# Altium PCB car_template 2020V3.PcbDoc (part 2 of 2)
Units mm, origin at the board's own origin, x right, y up, seen from the top; angles counter-clockwise.
Board outline 64 x 85 mm, 4 copper layers (Top Side, Ground Plane, Power Plane, Bottom Side), stack 0.844 mm thick; 154 components, 91 nets, 434 pads, 166 vias.
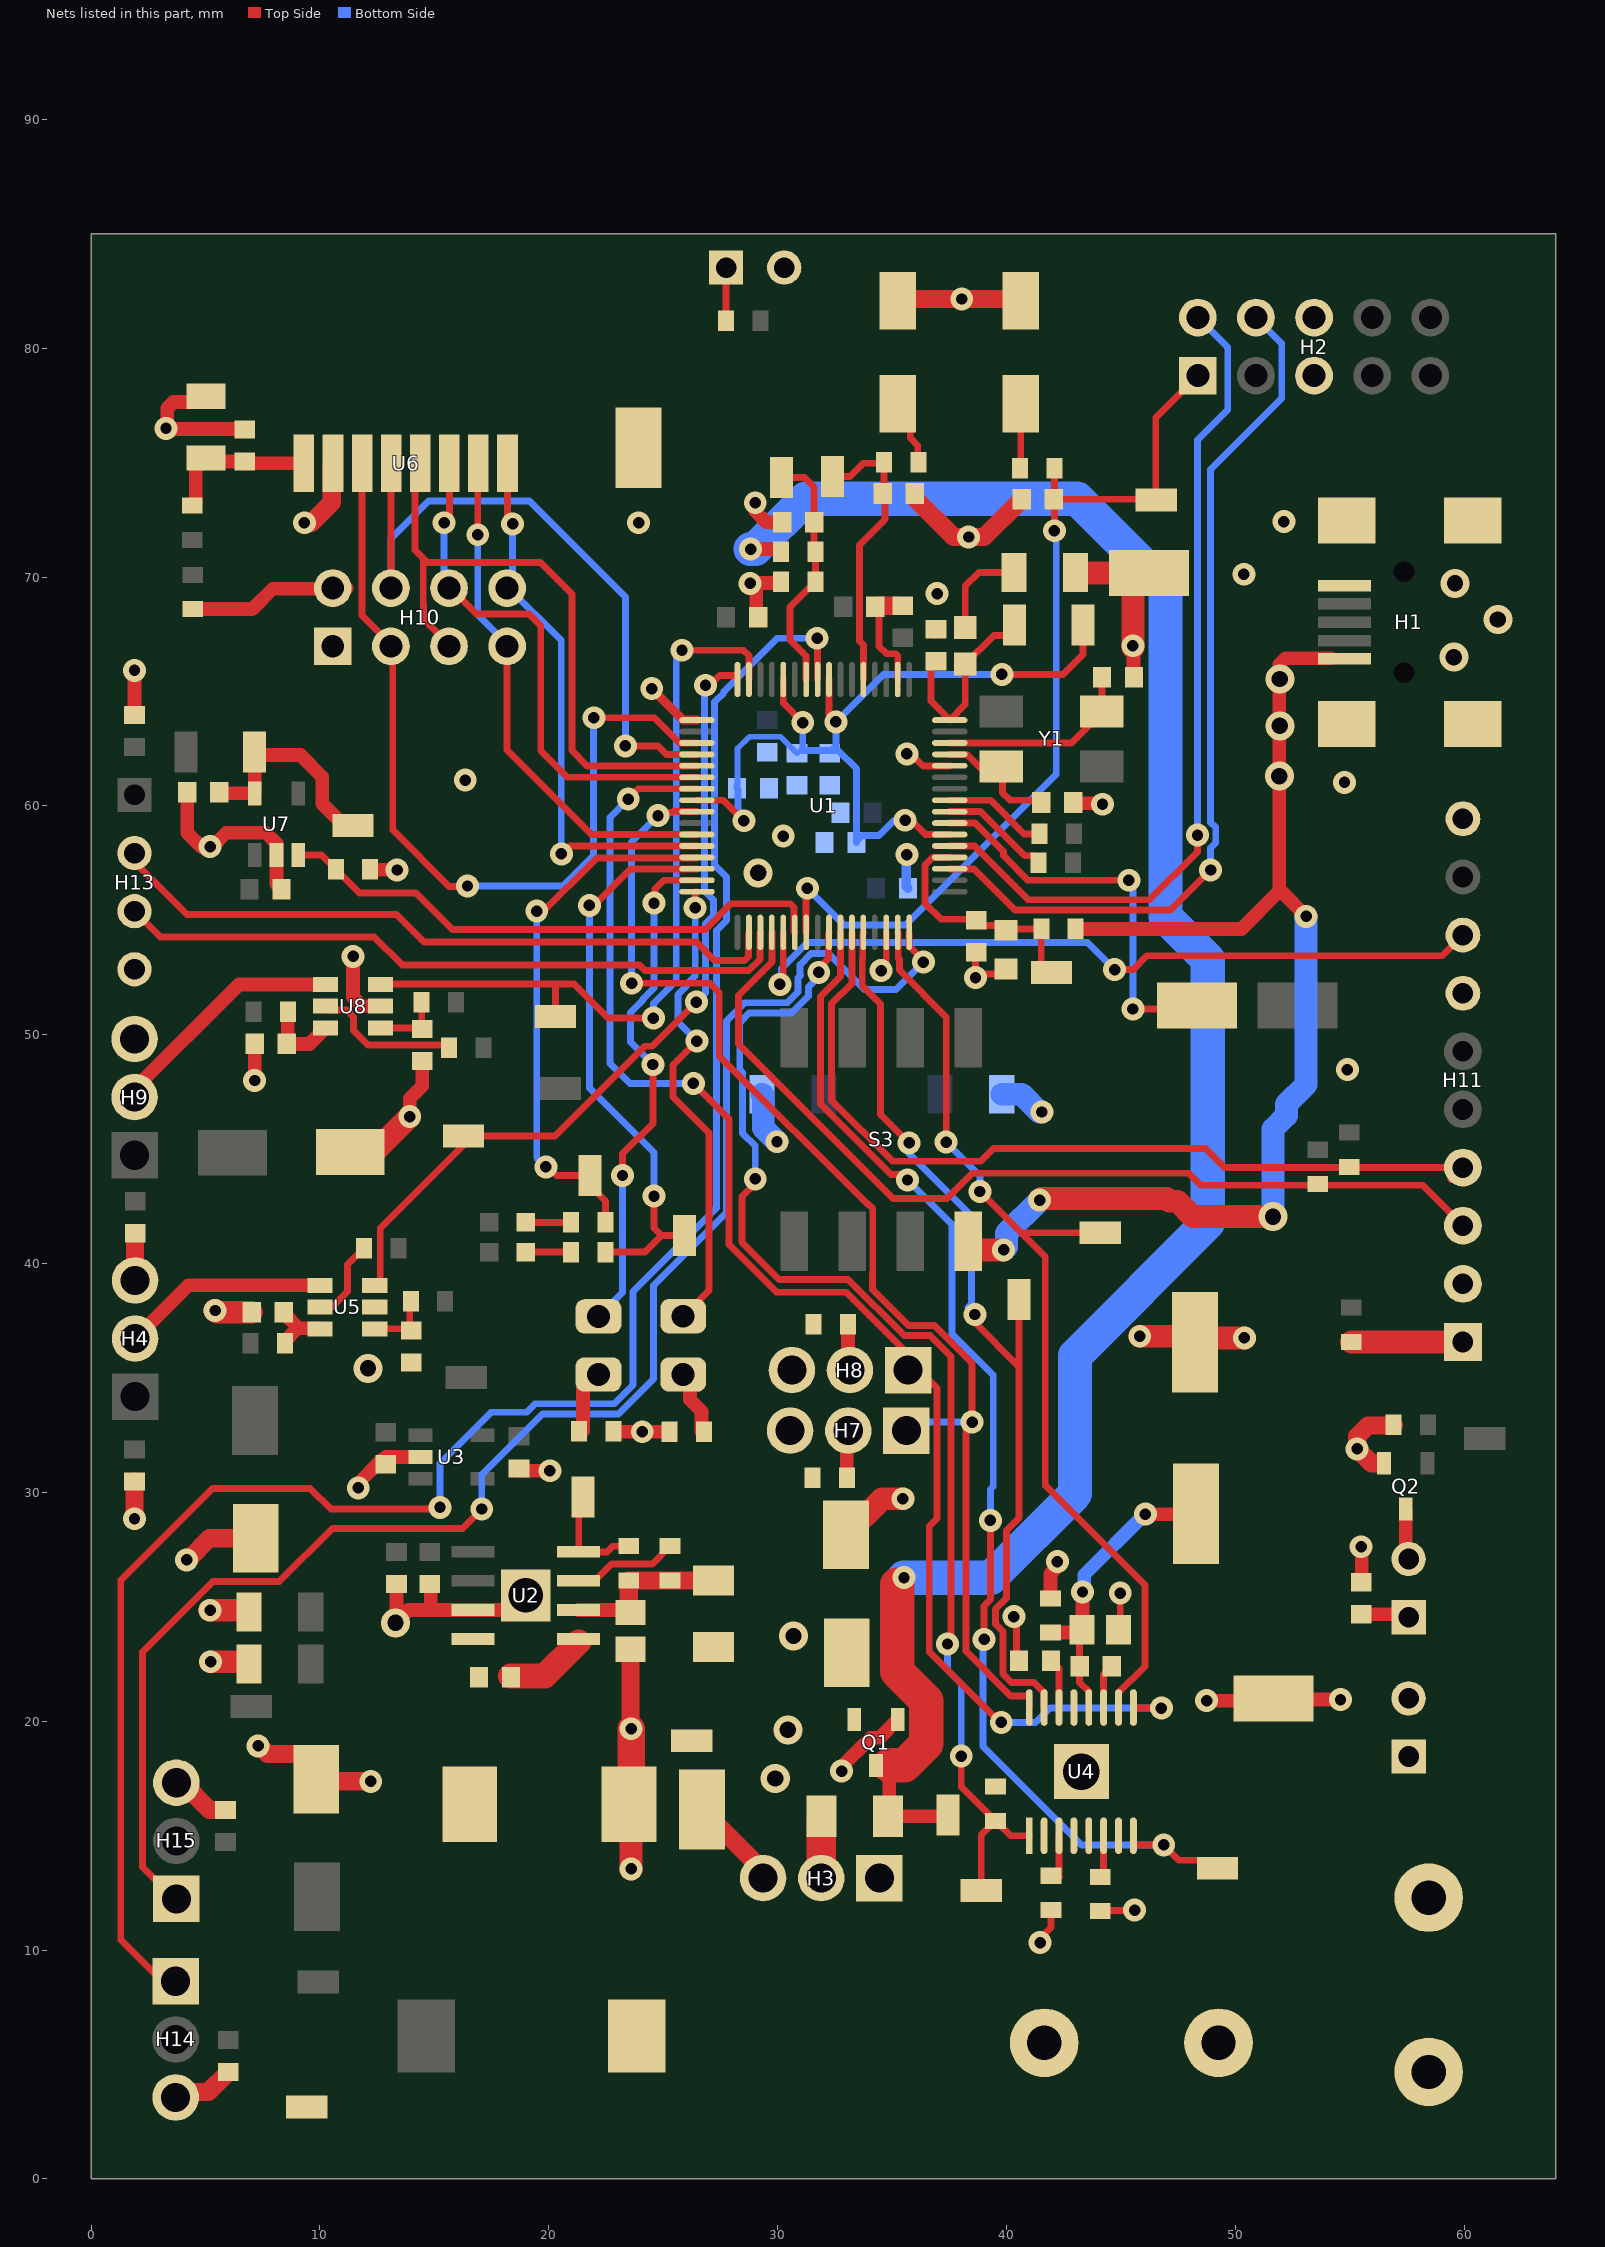
[diagram p4: the nets of this part, all layers, seen from the top]

## Via types
v1: diameter 1, hole 0.5, Top Side to Bottom Side, 145 vias
v2: diameter 1.27, hole 0.711, Top Side to Bottom Side, 19 vias
v3: diameter 2.2, hole 1.6, Top Side to Bottom Side, 1 vias
v4: diameter 2, hole 1.5, Top Side to Bottom Side, 1 vias

## Nets (pads, with @x,y where several pads share a name; then routed paths per layer and width w, separated by ;. In a path a pad name is that pad's centre, name@x,y a point inside that pad or via, vN(x,y) a via of type N, cw(c..) or ccw(c..) an arc to the next point about the centre after c; other vN are vias at no path point) (continued)
GND: C1.1 C2.1 C3.1 C4.1 C5.1 C6.2 C7.1 C8.2 C9.1 C10.2 C11.1 C12.2 C13.1 C15.2 C17.1 C18.1 C19.1 C21.1 C22.1 C23.1 C24.1 C25.1 C26.1 C27.1 C28.1 C29.1 C30.1 C31.1 C32.1 C33.1 C34.1 C35.1 C36.1 C37.1 C38.1 C39.1 C40.1 C41.1 C44.1 C47.1 C48.1 C50.1 C51.1 C52.1 C53.1 C54.1 C55.1 D1.1 GND_BUCK.1 GND_HBR.1 GND_MCU.1 GND_RADIO.1 H1.5 H1.6 H1.7 H1.8 H1.9 H2.5 H2.6 H3.1 H3.3 H4.3 H7.3 H8.3 H9.3 H10.1 H11.2 H11.7 H11.10 H12.2 H13.4 H14.3 H15.3 H16.2 Q1.1 Q2.2 R2.1 R7.1 R10.1 R12.2 R13.2 R20.1 R29.1 R30.1 R31.2 R32.2 S1.1 S2.1 U1.2 U1.17 U1.46 U1.60 U2.7 U2.EPAD U3.2 U4.13 U4.17 U5.2 U6.2 U7.2 U8.2 | length 159.9
  Top Side w0.3: C5.1@34.275,68.7 34.425,68.55 34.425,66.976 34.751,66.65 35.164,66.65 35.25,66.564 U1.2@35.25,65.525 ; v1(34.525,52.8) 34.525,52.989 34.75,53.214 U1.46@34.75,54.475 ; v1(35.65,62.275) 35.839,62.275 36.364,61.75 U1.60@37.525,61.75 ; C30.1@38.475,53.7 C30.1@38.625,53.55 ; C30.1@38.65,53.5 v1(38.65,52.5) 38.839,52.5 38.989,52.65 39.75,52.65 R2.1@39.975,52.875 ; v1(40.325,24.575) 40.437,24.463 40.437,22.763 C22.1@40.55,22.65 ; v1(41.475,10.325) 41.475,10.514 41.95,10.989 R31.2@41.95,11.75 ; R32.2@43.95,11.725 45.575,11.725 v1(45.6,11.75) ; C21.1@44.9,24 44.975,24.075 v1(44.975,25.6)
  Top Side w0.4: v1(24.5,65.125) 25.875,63.75 U1.17@26.475,63.75
  Top Side w0.6: C44.1@1.9,63.975 v1(1.9,65.925) ; v1(3.275,76.5) 3.325,76.55 3.325,77.374 3.601,77.65 4.775,77.65 C39.1@5.025,77.9 ; v1@3.325,76.45 3.35,76.475 6.7,76.475 C35.1@6.725,76.45 ; C34.1@4.2,60.6 4.2,58.825 4.8,58.225 v1(5.2,58.225) 5.308,58.225 5.908,58.825 7.636,58.825 8.1,58.361 U7.2@8.1,57.85 8.1,56.575 C33.1@8.325,56.35 ; v1(7.15,48) C40.1@7.15,49.6 ; v1(11.45,53.425) 11.45,51.65 11.85,51.25 U8.2@12.65,51.25 ; v1(11.675,30.2) 11.675,30.4 12.688,31.413 C31.1@12.875,31.225 12.875,31.55 U3.2@14.4,31.55 ; R30.1@12.2,57.225 12.212,57.212 13.363,57.212 v1(13.375,57.2) ; C17.1@13.35,26 13.35,24.35 v2(13.3,24.3) 13.865,24.865 14.85,24.865 ; v1(13.925,46.425) 13.925,47.208 14.475,47.758 C38.1@14.475,48.85 ; C18.1@14.8,26 14.85,25.95 14.85,24.865 ; C32.1@18.7,31.05 18.688,31.037 18.688,30.95 v1(20.05,30.95) ; v4(19,25.5) 18.365,24.865 U2.7@16.689,24.865 14.85,24.865 ; R12.2@22.975,32.675 23,32.65 v1(24.088,32.65) R13.2@25.175,32.65 ; v1(29.025,73.25) 29.025,72.875 29.5,72.4 C25.1@30.2,72.4 ; C52.1@29.15,68.25 29.073,68.327 29.073,69.725 29.087,69.739 30.1,69.739 30.15,69.789 R10.1@30.15,69.8 ; v1(32.8,17.825) 32.8,18.011 34.064,19.275 34.45,19.275 Q1.1@35.25,20.075 ; C4.1@42.925,60.15 42.962,60.112 44.163,60.112 v1(44.2,60.075) ; v1(45.525,67) 45.55,66.975 45.55,65.65 C3.1@45.575,65.625 ; v1(48.75,20.9) 51.525,20.9 51.575,20.95 v1(54.6,20.95) ; C50.1@55.5,26.075 55.525,26.1 55.525,27.6 v1(55.5,27.625)
  Top Side w0.8: v1(1.9,28.85) C27.1@1.9,30.475 ; H4.3@1.925,39.265 C37.1@1.925,41.325 ; v1(3.275,76.5) 3.375,76.502 3.326,76.451 v1@3.325,76.45 ; H14.3@3.7,3.56 3.936,3.796 5.121,3.796 C47.1@6,4.675 ; H15.3@3.725,17.315 3.985,17.315 5.175,16.125 C41.1@5.875,16.125 ; v1(4.175,27.05) 4.229,27.05 5.179,28 C36.1@7.2,28 ; v1(7.3,18.925) 7.354,18.925 7.709,18.57 9.242,18.57 9.842,17.97 C48.1@9.842,17.47 9.937,17.375 v1(12.225,17.375) ; v1(9.325,72.375) 9.625,72.375 10.521,73.271 10.521,74.925 U6.2@10.571,74.975 ; C1.1@23.575,23.15 23.575,19.7 v1(23.6,19.675) ; GND_BUCK.1@26.9,16.3 26.9,15.953 29.37,13.483 H3.3@29.37,13.15 ; C5.1@34.275,68.7 34.325,68.75 C13.1@35.325,68.75 ; S2.1@35.8,82.1 35.825,82.075 35.9,82.15 v1(38.05,82.15) 40.55,82.15 S1.1@40.625,82.075 ; C54.1@36.075,73.375 37.7,71.75 v1(38.35,71.75) 39.025,71.75 C53.1@40.675,73.4 ; C15.2@36.887,67.725 C15.2@36.925,67.725 ; Q2.2@56.3,31.275 55.95,31.275 v1(55.325,31.9) 55.325,32.45 55.8,32.925 56.9,32.925 R29.1@56.925,32.95
  Top Side w1: v1(5.2,24.85) 6.725,24.85 6.85,24.725 C19.1@6.9,24.775 ; v1(5.225,22.6) 6.7,22.6 6.85,22.45 C23.1@6.9,22.5 ; v1(5.425,37.95) 5.5,37.875 C29.1@7.025,37.875 ; C2.1@11.325,44.875 12.375,44.875 v1(13.925,46.425) ; D1.1@23.5,16.375 23.6,16.275 v1(23.6,13.55) ; C55.1@32.992,28.145 34.572,29.725 v1(35.475,29.725) ; R7.1@43.025,70.2 43.05,70.175 46.025,70.175 45.525,69.675 v1@45.525,66.925 ; v1(45.825,36.825) 47.991,36.825 C51.1@48.246,36.569 48.427,36.75 v1(50.4,36.75) ; GND_MCU.1@46.225,69.775 GND_MCU.1@46.225,70.175
  Top Side w1.2: D1.1@23.5,16.375 23.6,16.475 v1(23.6,19.675)
  Bottom Side w0.4: v1(35.65,57.875) 35.626,57.851 35.626,56.474 C9.1@35.7,56.4
  Bottom Side w0.6: v1@41.442,46.625 v1(41.55,46.625)
  Bottom Side w1: C24.1@29.325,47.4 29.375,47.35 29.375,45.925 v1(29.975,45.325) ; C26.1@39.8,47.4 40.667,47.4 v1@41.442,46.625
  other v1: 54.9,48.475 30.248,58.677 54.775,61.025 16.35,61.125 36.975,69.275 28.8,69.725 50.375,70.125 23.925,72.375 52.125,72.425
  other v2: 12.1,35.425 29.15,57.075 59.55,66.5 61.475,68.15 59.6,69.725
  other v3: 43.275,17.8
LED_TAPE_3V3_A: TAPE_A.1 U1.16 U5.3 | length 36.7
  Top Side w0.3: U5.3@12.4,39.05 12.463,39.05 12.638,39.225 12.638,41.538 16.675,45.575 TAPE_A.1@16.275,45.575 ; TAPE_A.1@16.951,45.575 20.275,45.575 22.128,47.428 24.2,49.5 24.525,49.5 v1(26.45,51.425) ; v1(26.85,65.275) 27.039,65.275 27.464,65.7 28.225,65.7 28.25,65.675 U1.16@28.25,65.525
  Bottom Side w0.3: v1(26.45,51.425) 26.85,51.825 26.85,54.869 27.2,55.219 27.2,55.881 26.8,56.281 26.8,65.225 v1(26.85,65.275)
LED_TAPE_3V3_B: TAPE_B.1 U1.15 U8.3 | length 34.6
  Top Side w0.3: U8.3@12.65,52.2 12.669,52.219 20.3,52.219 ; TAPE_B.1@20.3,50.8 20.3,52.219 ; v1(24.575,50.725) 22.6,50.725 21.106,52.219 20.3,52.219 ; v1(25.825,66.8) 28.514,66.8 28.75,66.564 U1.15@28.75,65.525
  Bottom Side w0.3: v1(24.575,50.725) 24.575,51.375 25.575,52.375 25.575,66.55 v1(25.825,66.8)
LED_TAPE_5V_A: H4.2 U5.4 | length 9.1
  Top Side w0.6: H4.2@1.7,37.06 2.26,37.06 4.25,39.05 U5.4@10,39.05
LED_TAPE_5V_B: H9.2 U8.4 | length 10.4
  Top Side w0.6: H9.2@1.8,47.54 6.46,52.2 U8.4@10.25,52.2
M1_OUT1: H5.1 U4.2 | length 0.4
  Top Side w1.5: H5.1@41.65,5.95 H5.1@41.65,6.356
M1_OUT2: H5.2 U4.4
M2_OUT1: H6.1 U4.7 | length 0.7
  Top Side w0.3: U4.7@44.9,14.35 U4.7@44.9,15
M2_OUT2: H6.2 U4.5 | length 0.7
  Top Side w0.3: U4.5@43.6,15 U4.5@43.6,15.65
MISO: H10.7 U1.27 U6.7 | length 23.3
  Top Side w0.3: v1(16.9,71.85) 16.9,74.946 U6.7@16.929,74.975 ; H10.7@18.018,66.975 H10.7@18.183,66.975 18.183,62.442 21.875,58.75 U1.27@26.475,58.75
  Bottom Side w0.3: v1(16.9,71.85) 16.9,68.34 H10.7@18.416,66.824
MOSI: H10.6 U1.22 U6.6 | length 23.1
  Top Side w0.3: v1(15.425,72.375) 15.657,72.607 U6.6@15.657,74.975 U6.6@15.671,74.961 ; H10.6@15.725,69.515 16.85,68.39 19.135,68.39 19.65,67.875 19.65,62.425 20.825,61.25 U1.22@26.475,61.25
  Bottom Side w0.3: v1(15.425,72.375) 15.425,69.815 H10.6@15.725,69.515
Net3V3_RADIO_1: 3V3_RADIO.1 C34.2 L3.1 U7.5 | length 9.7
  Top Side w0.6: C34.2@5.6,60.6 5.65,60.55 U7.5@7.15,60.55 L3.1@7.15,62.35 7.275,62.225 9.15,62.225 10.1,61.275 10.1,60.1 11.05,59.15 3V3_RADIO.1@11.45,59.15
Net5V_BUCK_RAW_1: BUCK_RAW.1 C16.2 D1.2 L2.1 U2.8 | length 0.1
  Top Side w1.1: D1.2@16.55,16.375 D1.2@16.654,16.479
NetC1_2: C1.2 F2.2 R8.2 R11.2 U2.2 | length 7.3
  Top Side w0.3: C1.2@23.46,24.865 23.5,24.825 C1.2@23.575,24.75
  Top Side w0.6: U2.2@21.311,24.865 C1.2@23.46,24.865
  Top Side w0.8: C1.2@23.5,24.825 R11.2@23.5,26.15 R8.2@25.3,26.15 F2.2@27.2,26.15
NetC3_2: C3.2 U1.62 Y1.3 | length 8.7
  Top Side w0.3: U1.62@37.525,62.75 42.85,62.75 44.175,64.075 C3.2@44.175,65.55
NetC4_2: C4.2 U1.61 Y1.1 | length 5.1
  Top Side w0.3: U1.61@37.525,62.25 38.276,62.25 38.6,61.926 ; 38.6,61.925 38.85,61.675 39.775,61.675 Y1.1@39.762,61.662 ; Y1.1@39.775,61.725 39.825,61.675 39.825,60.575 40.15,60.25 41.062,60.25 41.062,60.237
NetC6_1: C6.1 C8.1 C10.1 C12.1 L1.2 U1.8 U1.12 U1.24 U1.54 | length 39.4
  Top Side w0.3: U1.24@26.475,60.25 27.625,60.25 v1(28.525,59.35) ; U1.12@30.25,65.525 30.25,64.49 v1(31.1,63.64) ; U1.8@32.25,65.525 32.25,63.975 v1(32.55,63.675) ; v1(35.575,59.375) 35.839,59.375 36.464,58.75 U1.54@37.525,58.75 ; v1(39.8,65.75) 42.475,65.75 43.35,66.625 L1.2@43.35,67.9
  Bottom Side w0.25: C10.1@28.2,60.9 28.25,60.95 28.25,62.504 28.771,63.025 30.125,63.025 C8.1@30.85,62.3
  Bottom Side w0.3: C10.1@28.225,60.775 28.275,60.725 28.275,59.789 28.525,59.539 v1(28.525,59.35) ; C8.1@31.075,62.425 C6.1@32.35,62.425 ; C8.1@31.075,62.475 31.1,62.5 v1(31.1,63.64) ; C12.1@33.45,58.4 C12.1@33.45,58.45 ; v1(35.575,59.375) 35.099,59.375 34.424,58.7 33.7,58.7 C12.1@33.45,58.45 ; v1(39.8,65.75) 34.625,65.75 v1(32.55,63.675) 32.55,62.625 C6.1@32.35,62.425 ; C6.1@32.35,62.425 32.65,62.425 33.45,61.625 C12.1@33.45,58.45
NetC14_1: C14.1 R7.2 | length 4.2
  Top Side w0.3: C14.1@38.2,67.8 38.2,69.6 38.8,70.2 R7.2@40.325,70.2
NetC14_2: C14.2 C15.1 L1.1 U1.64 | length 8.2
  Top Side w0.3: 36.7,65.9 36.7,64.575 U1.64@37.525,63.75 38.2,64.425 C14.2@38.2,66.2 39.45,67.45 L1.1@40.275,67.45 ; L1.1@40.35,67.9 L1.1@40.612,68.163
NetC16_1: C16.1 U2.1 | length 3.7
  Top Side w0.3: U2.1@21.311,23.461 U2.1@21.311,23.595
  Top Side w1.1: C16.1@18.325,21.975 19.825,21.975 U2.1@21.311,23.461
NetC20_1: C20.1 U4.11 | length 1.9
  Top Side w0.3: U4.11@44.25,20.6 44.25,22.05 C20.1@44.6,22.4
NetC20_2: C20.2 C21.2 C51.2 R17.1 U4.12 | length 13.3
  Top Side w0.3: C21.2@43.2,23.9 C20.2@43.2,22.4 43.2,21.7 43.6,21.3 U4.12@43.6,20.6
  Top Side w0.6: R17.1@41.85,23.875 C21.2@43.175,23.875 ; C21.2@43.3,24 43.325,24.025 v1(43.325,25.65) ; v1(46.075,29.05) 48.255,29.05 C51.2@48.279,29.074
  Top Side w1: C21.2@43.175,23.875 C21.2@43.2,23.9
  Bottom Side w0.6: v1(43.325,25.65) 43.402,25.727 43.402,26.402 46.05,29.05 v1(46.075,29.05)
NetC22_2: C22.2 U4.14 | length 2.2
  Top Side w0.3: C22.2@41.95,22.65 42.3,22.3 U4.14@42.3,20.6
NetC28_2: C28.2 R15.2 U5.1 | length 3
  Top Side w0.3: U5.1@12.4,37.15 13.85,37.15 C28.2@14,37 ; R15.2@13.925,38.35 13.925,37.15 C28.2@14,37.075
NetC29_2: C29.2 R16.1 U5.6 | length 2.8
  Top Side w0.6: C29.2@8.425,37.875 8.425,37.825 9.075,37.175 ; R16.1@8.475,36.525 8.475,36.625 9.025,37.175 9.075,37.175 ; U5.6@10,37.15 9.975,37.175 9.075,37.175
NetC35_2: C35.2 C39.2 R19.1 U6.1 | length 6.8
  Top Side w0.6: R19.1@4.425,73.125 4.525,73.125 4.575,73.175 4.575,74.75 C39.2@5.025,75.2 5.175,75.05 C35.2@6.725,75.05 6.8,74.975 U6.1@9.3,74.975
NetC38_2: C38.2 R21.2 U8.1 | length 3.1
  Top Side w0.3: U8.1@12.65,50.3 14.35,50.3 14.45,50.2 14.45,51.4 R21.2@14.425,51.425
NetC40_2: C40.2 R22.1 U8.6 | length 3.5
  Top Side w0.3: C40.2@8.55,49.6 8.6,49.65 C40.2@8.65,49.7
  Top Side w0.6: C40.2@8.55,49.6 9.55,49.6 U8.6@10.25,50.3 ; C40.2@8.6,49.65 R22.1@8.6,51
NetDL1_1: DL1.1 R6.2 | length 2
  Top Side w0.3: DL1.1@19,40.5 R6.2@20.975,40.5
NetDL2_1: DL2.1 R5.2 | length 2
  Top Side w0.3: DL2.1@19,41.8 R5.2@20.975,41.8
NetF1_1: F1.1 H3.2 | length 2.8
  Top Side w0.3: F1.1@31.935,15.66 F1.1@32.125,15.85
  Top Side w1.3: H3.2@31.91,13.15 F1.1@31.91,15.66
NetH7_2: H7.2 R27.1 | length 2.1
  Top Side w0.3: H7.2@33.05,33.085 H7.2@33.115,33.15
  Top Side w0.6: R27.1@33.025,30.65 H7.2@33.025,32.635
NetH8_2: H8.2 R28.1 | length 2
  Top Side w0.3: H8.2@33.1,35.89 H8.2@33.19,35.8
  Top Side w0.6: H8.2@33.075,35.44 R28.1@33.075,37.35
NetH10_2: H10.2 R35.1 | length 6.4
  Top Side w0.6: R35.1@4.45,68.6 7.05,68.6 7.94,69.49 H10.2@9.92,69.49 ; H10.2@10.563,69.515 H10.2@11.162,69.515
NetH11_1: H11.1 R36.1 | length 4.9
  Top Side w1: R36.1@55.075,36.575 H11.1@59.95,36.575
NetH11_8: H11.8 U1.37 | length 34.4
  Top Side w0.3: v1(30.101,52.201) 30.25,52.35 U1.37@30.25,54.475 ; v1(44.725,52.85) 45.55,52.85 46.152,53.452 59.047,53.452 H11.8@59.95,54.355
  Bottom Side w0.3: v1(30.101,52.201) 30.176,52.276 30.176,52.894 31.307,54.025 43.55,54.025 v1(44.725,52.85)
NetH12_1: H12.1 R26.2 | length 2.6
  Top Side w0.3: H12.1@27.5,83.525 H12.1@27.665,83.36 ; R26.2@27.7,81.2 R26.2@27.775,81.275 ; R26.2@27.75,81.275 27.75,83.36 H12.1@27.75,83.525
NetH17_2: H17.2 Q2.3 | length 2.2
  Top Side w0.3: H17.2@57.4,27.215 H17.2@57.45,27.265 ; Q2.3@57.45,29.275 Q2.3@57.45,29.425
  Top Side w0.6: H17.2@57.45,27.265 Q2.3@57.45,29.275
NetJ1_1: J1.1 U1.31 | length 22.6
  Top Side w0.3: v1(23.225,43.85) 23.225,44.8 24.55,46.125 v1(24.55,48.7) ; v1(24.6,55.75) 24.65,55.8 24.65,56.375 25.025,56.75 U1.31@26.475,56.75
  Bottom Side w0.3: J1.1@22.175,37.694 22.303,37.694 22.886,38.277 22.886,38.405 23.225,38.744 v1(23.225,43.85) ; v1(24.55,48.7) 23.575,49.675 23.575,50.975 24.125,51.525 24.125,51.561 24.6,52.036 v1(24.6,55.75)
NetJ1_2: J1.2 R12.1 | length 3
  Top Side w0.3: J1.2@22.2,35.625 J1.2@22.25,35.675
  Top Side w0.6: R12.1@21.475,32.675 21.5,32.7 21.5,34.475 21.521,34.496 21.521,34.706 21.966,35.15 J1.2@22.175,35.15
NetJ2_1: J2.1 U1.32 | length 20.9
  Top Side w0.3: J2.1@25.875,37.7 26.003,37.7 26.586,38.283 26.586,38.411 27,38.825 27,45.7 25.425,47.275 25.425,48.675 v1(26.475,49.725) ; v1(26.4,55.55) 26.4,56.225 26.425,56.25 U1.32@26.475,56.25
  Bottom Side w0.3: v1(26.4,55.55) 26.4,52.575 26.025,52.2 26.025,52.131 25.65,51.756 25.65,50.55 v1(26.475,49.725)
NetJ2_2: J2.2 R13.1 | length 3.5
  Top Side w0.3: J2.2@25.825,35.675 J2.2@25.85,35.65
  Top Side w0.6: J2.2@25.875,35.156 26.084,35.156 26.529,34.712 26.175,34.712 26.175,34.05 26.675,33.55 R13.1@26.675,32.65
NetnFAULT_1: nFAULT.1 U1.42 U4.8 | length 53.4
  Top Side w0.3: U1.42@32.75,54.475 32.75,52.545 31.875,51.67 31.875,46.982 34.957,43.9 35.501,43.9 35.677,43.724 v1(35.677,43.652) ; v1(39.027,23.576) 39.027,25.045 39.3,25.318 v1(39.3,28.775) ; U4.8@45.55,15 45.55,14.6 v1(46.875,14.6) 47.55,13.925 nFAULT.1@49,13.925
  Bottom Side w0.3: v1(35.677,43.652) 37.625,41.704 37.625,36.925 39.425,35.125 39.425,30.25 39.3,30.125 v1(39.3,28.775) ; v1(39.027,23.576) 38.975,23.524 38.975,18.9 43.275,14.6 v1(46.875,14.6)
NetnSLEEP_1: nSLEEP.1 R20.2 U1.41 U4.1 | length 54.1
  Top Side w0.3: v1(29.025,43.7) 29.025,43.511 28.45,42.936 28.45,40.921 29.996,39.375 ; 30.058,39.312 33.074,39.312 35.536,36.85 36.661,36.85 37.575,35.936 37.575,23.524 v1(37.427,23.376) ; v1(31.802,52.728) 31.802,52.917 32.225,53.34 32.225,54.45 U1.41@32.25,54.475 ; v1(38.025,18.475) 38.025,17.15 R20.2@39.525,15.65 ; nSLEEP.1@38.9,12.6 38.9,15.025 R20.2@39.525,15.65 ; U4.1@41,15 40.175,15 R20.2@39.525,15.65
  Bottom Side w0.3: v1(29.025,43.7) 29.025,45.144 28.475,45.694 28.475,48.347 28.35,48.472 28.35,50.539 28.762,50.951 30.619,50.951 31.351,51.683 31.351,52.087 31.802,52.538 v1(31.802,52.728) ; v1(37.427,23.376) 37.427,22.248 38.025,21.65 v1(38.025,18.475)
NetPGOOD_1: PGOOD.1 R11.1 U2.4 | length 4.7
  Top Side w0.3: PGOOD.1@21.4,29.8 21.311,29.711 U2.4@21.311,27.405 22.555,27.405 22.8,27.65 R11.1@23.5,27.65
NetPWMH1_B_1: PWMH1_B.1 U1.47 U4.10 | length 42.3
  Top Side w0.3: U1.47@35.25,54.475 35.275,54.45 35.275,53.356 35.325,53.306 35.325,52.825 37.369,50.781 v1(37.369,45.305) ; v1(38.84,43.15) 40.64,41.35 ; PWMH1_B.1@44.1,41.35 40.64,41.35 ; U4.10@44.9,20.6 44.9,21.25 46.05,22.4 46.05,25.95 41.7,30.3 41.7,40.29 40.64,41.35
  Bottom Side w0.3: v1(37.369,45.305) 38.84,43.834 v1(38.84,43.15)
NetPWMH2_B_1: PWMH2_B.1 U1.44 U4.15 | length 41.2
  Top Side w0.3: U1.44@33.75,54.475 33.725,54.45 33.725,53.356 33.7,53.331 33.7,52.15 34.5,51.35 34.5,46.525 v1(35.75,45.275) ; v1(38.625,37.775) 38.625,37.425 40.538,35.513 ; PWMH2_B.1@40.55,38.425 40.55,28.894 40.002,28.346 40.002,25.383 39.525,24.906 39.525,24.244 39.85,23.919 39.85,22.076 40.226,21.7 41.2,21.7 41.65,21.25 U4.15@41.65,20.6
  Bottom Side w0.3: v1(35.75,45.275) 35.75,44.8 38.475,42.075 38.475,38.225 v1@38.325,38.075
NetR3_2: R3.2 U1.57 | length 4.5
  Top Side w0.3: U1.57@37.525,60.25 39.3,60.25 40.775,58.775 R3.2@41.45,58.775
NetR4_2: R4.2 U1.56 | length 4.9
  Top Side w0.3: U1.56@37.525,59.75 38.875,59.75 40.8,57.825 41.2,57.825 41.4,57.625 R4.2@41.4,57.525
NetR8_1: R8.1 U2.3 | length 4.6
  Top Side w0.3: U2.3@21.311,26.135 21.997,26.135 22.737,26.875 24.525,26.875 R8.1@25.3,27.65
NetR14_2: R14.2 S1.2 | length 2.8
  Top Side w0.3: R14.2@40.6,74.75 40.625,74.775 S1.2@40.625,77.575
NetR18_2: R18.2 S2.2 | length 2.9
  Top Side w0.3: S2.2@35.8,77.6 35.8,76.075 36.125,75.75 R18.2@36.125,74.8
NetR23_1: R23.1 U8.5 | length 6.5
  Top Side w0.3: U8.5@10.25,51.25 10.425,51.075 11.176,51.075 11.475,50.776 11.475,50.175 12.1,49.55 15.525,49.55 R23.1@15.65,49.425
NetR24_1: R24.1 U5.5 | length 3.7
  Top Side w0.3: U5.5@10,38.1 10.525,38.1 11.2,38.775 11.2,39.95 R24.1@11.925,40.675
NetR30_2: R30.2 U1.38 U7.3 | length 24.6
  Top Side w0.3: U7.3@9.05,57.85 10.075,57.85 R30.2@10.7,57.225 11.725,56.2 14.2,56.2 15.8,54.6 26.85,54.6 27.975,55.725 30.55,55.725 30.725,55.55 30.725,54.5 U1.38@30.75,54.475
NetR31_1: R31.1 U4.3 | length 1.8
  Top Side w0.3: U4.3@42.3,15 42.3,13.225 R31.1@42.325,13.2
NetR32_1: R32.1 U4.6 | length 1.8
  Top Side w0.3: R32.1@44,13.325 44.05,13.325 44.25,13.525 U4.6@44.25,15
NetTP2_1: TP2.1 U1.55 | length 17.6
  Top Side w0.3: U1.55@37.525,59.25 38.625,59.25 39.875,58 39.875,57.826 40.951,56.75 v1(45.35,56.75) ; v1(45.525,51.125) 46.775,51.125 47.625,51.975 TP2.1@47.938,51.663
  Bottom Side w0.3: v1(45.35,56.75) 45.525,56.575 v1(45.525,51.125)
nRST: C53.2 H2.1 nRST.1 R14.1 U1.39 | length 40
  Top Side w0.3: U1.39@31.25,54.475 31.25,56.35 v1(31.3,56.4) ; v1(42.1,72.025) 42.1,73.375 C53.2@42.075,73.4 ; R14.1@42.1,74.75 42.1,73.425 C53.2@42.075,73.4 ; nRST.1@46.525,73.675 46.525,76.96 H2.1@48.365,78.8 ; nRST.1@46.55,73.375 46.525,73.4 C53.2@42.075,73.4
  Bottom Side w0.3: v1(31.3,56.4) 32.9,54.8 35.6,54.8 42.177,61.377 42.177,71.948 v1(42.1,72.025)
PWMH0: H15.1 U1.48 | length 68.7
  Top Side w0.3: H15.1@2.925,12.96 2.25,13.635 2.25,23.031 5.319,26.1 8.224,26.1 10.549,28.425 16.225,28.425 v1(17.075,29.275) ; U1.48@35.75,54.475 35.75,53.875 36.375,53.25 v1(36.375,53.175)
  Bottom Side w0.3: v1(17.075,29.275) 17.075,30.781 19.719,33.425 23.041,33.425 24.575,34.959 24.575,39.039 27.775,42.239 27.775,50.6 28.576,51.401 30.432,51.401 30.901,51.869 30.901,52.482 31,52.581 30.975,52.606 30.975,53.056 31.469,53.55 32.225,53.55 33.8,51.975 35.175,51.975 v1(36.375,53.175)
PWMH1_A: H8.1 U1.23 U4.9 | length 62.7
  Top Side w0.3: v1(23.475,60.3) 23.925,60.75 U1.23@26.475,60.75 ; v1(26.325,47.875) 27.875,46.325 27.875,40.825 29.95,38.75 33,38.75 H8.1@35.537,36.213 ; H8.1@35.73,35.8 36.971,34.559 36.971,28.861 36.627,28.517 36.627,23.045 39.722,19.95 v1(39.775,19.95) ; U4.9@45.55,20.6 45.575,20.575 v1(46.775,20.575)
  Bottom Side w0.3: v1(23.475,60.3) 22.675,59.5 22.675,48.75 23.55,47.875 v1(26.325,47.875) ; v1(39.775,19.95) 41.275,19.95 41.9,20.575 v1(46.775,20.575)
PWMH2_A: H7.1 U1.25 U4.16 | length 54.7
  Top Side w0.3: v1(23.625,52.25) 27.05,52.25 27.45,51.85 27.45,49.082 33.957,42.575 33.984,42.575 34.16,42.399 34.16,39.542 34.152,39.534 34.152,38.871 35.723,37.3 36.848,37.3 38.5,35.648 v1(38.5,33.075) 38.227,32.802 38.227,23.062 40.189,21.1 41,21.1 U4.16@41,20.6 ; v1(24.775,59.575) 24.909,59.709 25.399,59.709 25.44,59.75 U1.25@26.475,59.75
  Bottom Side w0.3: v1(23.625,52.25) 23.625,58.425 v1(24.775,59.575) ; H7.1@35.655,33.15 35.755,33.05 35.78,33.075 v1(38.5,33.075)
PWMH3: H14.1 U1.9 | length 84.8
  Top Side w0.3: H14.1@2.725,9.015 1.3,10.44 1.3,26.175 5.3,30.175 9.575,30.175 10.475,29.275 15.175,29.275 v1(15.25,29.35) ; v1(31.725,67.325) 31.75,67.3 U1.9@31.75,65.525
  Bottom Side w0.3: v1(15.25,29.35) 15.25,31.275 17.477,33.502 19.032,33.502 19.406,33.875 22.855,33.875 23.675,34.695 23.675,38.775 27.325,42.425 27.325,54.55 27.775,55 27.775,56.901 27.25,57.426 27.25,64.544 27.65,64.944 27.65,65 29.975,67.325 v1(31.725,67.325)
RADIO_CE: H10.3 U1.19 U6.3 | length 37.9
  Top Side w0.3: U6.3@11.843,74.975 11.843,69.908 11.845,69.906 11.845,68.315 13.185,66.975 13.185,58.94 15.65,56.475 16.425,56.475 v1(16.45,56.5) ; v1(21.975,63.85) 24.624,63.85 25.724,62.75 U1.19@26.475,62.75
  Bottom Side w0.3: v1(16.45,56.5) 20.625,56.5 21.95,57.825 21.95,63.825 v1(21.975,63.85)
RADIO_CSN: H10.4 U1.20 U6.4 | length 30.3
  Top Side w0.3: U6.4@13.114,74.975 13.114,69.586 13.185,69.515 H10.4@13.185,69.492 ; v1(23.35,62.625) 24.764,62.625 25.139,62.25 U1.20@26.475,62.25
  Bottom Side w0.3: H10.4@13.103,69.515 13.103,71.677 14.75,73.325 19.15,73.325 23.35,69.125 v1(23.35,62.625) v1@23.35,62.436
RADIO_IRQ: H10.8 U1.28 U6.8 | length 24.8
  Top Side w0.3: H10.8@18.183,68.985 H10.8@18.183,69.515 ; U6.8@18.2,74.975 18.2,72.55 v1(18.425,72.325) ; v1(20.55,57.9) 20.9,58.25 U1.28@26.475,58.25
  Bottom Side w0.3: v1(18.425,72.325) 18.425,69.799 18.203,69.577 20.55,67.23 v1(20.55,57.9)
RXD0: H13.3 U1.35 | length 29.8
  Top Side w0.3: H13.3@1.9,55.4 3.025,54.275 12.375,54.275 13.6,53.05 23.956,53.05 24.206,52.8 28.739,52.8 29.225,53.286 29.225,54.45 U1.35@29.25,54.475
SCK: H10.5 U1.21 U6.5 | length 28.5
  Top Side w0.3: U6.5@14.386,74.975 14.15,74.739 14.15,71.185 14.518,70.818 ; H10.5@15.725,66.975 14.525,68.175 14.525,68.788 14.518,68.796 14.518,70.818 ; U1.21@26.475,61.75 21.675,61.75 21.013,62.412 21.013,69.263 19.635,70.64 14.695,70.64 14.518,70.818
SLEEP/WKUP: C54.2 R18.1 SLEEP/WKUP.1 U1.5 | length 12.9
  Top Side w0.3: SLEEP/WKUP.1@32.525,74.275 SLEEP/WKUP.1@32.4,74.4 33.175,74.4 33.75,74.975 34.6,74.975 R18.1@34.65,75.025 34.65,73.7 C54.2@34.6,73.65 34.7,73.55 34.7,72.525 33.575,71.4 33.575,68.849 33.575,67.701 33.575,67.2 33.75,67.025 U1.5@33.75,65.525 ; C54.2@34.525,73.675 C54.2@34.575,73.625 ; R18.1@34.6,74.725 34.6,74.775 R18.1@34.625,74.8
STATUS0: R6.1 STATUS0.1 U1.30 | length 24.9
  Top Side w0.3: v1(21.775,55.65) 21.975,55.65 23.575,57.25 U1.30@26.475,57.25 ; R6.1@22.475,40.5 24.2,40.5 24.925,41.225 ; v1(24.6,42.95) 24.6,41.55 24.925,41.225 ; STATUS0.1@25.975,41.175 STATUS0.1@25.925,41.225 24.925,41.225
  Bottom Side w0.3: v1(21.775,55.65) 21.775,47.675 24.6,44.85 v1(24.6,42.95)
STATUS1: R5.1 STATUS1.1 U1.29 | length 23.8
  Top Side w0.3: v1(19.475,55.4) 19.625,55.25 22.1,57.725 26.45,57.725 U1.29@26.475,57.75 ; v1(19.875,44.225) 19.975,44.225 20.35,43.85 STATUS1.1@21.8,43.85 21.8,43.4 22.475,42.725 R5.1@22.475,41.8
  Bottom Side w0.3: v1(19.475,55.4) 19.475,44.625 v1(19.875,44.225)
SWCLK: H2.2 U1.53 | length 37.1
  Top Side w0.3: U1.53@37.525,58.25 38.6,58.25 40.95,55.9 46.256,55.9 48.35,57.994 v1(48.35,58.725)
  Bottom Side w0.3: v1(48.35,58.725) 48.35,76 49.675,77.325 49.675,80.03 H2.2@48.365,81.34
SWDIO: H2.4 U1.51 | length 38.9
  Top Side w0.3: U1.51@37.525,57.25 38.575,57.25 40.375,55.45 47.175,55.45 v1(48.925,57.2)
  Bottom Side w0.3: v1(48.925,57.2) 48.925,58.169 49.15,58.394 49.15,59.056 48.925,59.281 48.925,74.7 52.03,77.805 52.03,80.215 H2.4@50.905,81.34
TWCK0: H11.3 R25.1 U1.36 | length 41.3
  Top Side w0.3: U1.36@29.75,54.475 29.75,53.175 28.3,51.725 28.3,49.594 35.041,42.852 37.41,42.852 38.508,43.95 47.95,43.95 48.475,43.425 58.18,43.425 H11.3@59.95,41.655
TWD0: H11.4 R33.1 U1.43 | length 37.7
  Top Side w0.3: U1.43@33.25,54.475 33.25,52.25 32.36,51.36 32.36,47.134 35.019,44.475 38.881,44.475 39.431,45.025 48.7,45.025 49.525,44.2 55.15,44.2 55.155,44.195 H11.4@59.95,44.195 H11.4@59.43,43.675
TXD0: H13.2 U1.34 | length 30.1
  Top Side w0.3: H13.2@1.9,57.94 1.9,57.55 4.2,55.25 13.344,55.25 14.544,54.05 26.45,54.05 27.25,53.25 28.552,53.25 28.725,53.423 28.725,54.45 U1.34@28.75,54.475
USB_DETECT: C30.2 R1.1 R2.2 U1.52 USB.1 | length 11
  Top Side w0.3: U1.52@37.525,57.75 36.774,57.75 36.45,57.426 36.45,55.731 37.131,55.05 38.5,55.05 38.526,55.076 38.826,54.775 39.775,54.775 R2.2@39.975,54.575 ; R2.2@39.95,54.55 40,54.5 40.125,54.625 R1.1@41.525,54.625 USB.1@41.525,52.4 ; USB.1@41.975,52.725 USB.1@42.15,52.725
VBAT: C50.2 C55.2 F2.1 H16.1 H17.1 Q1.2 R17.2 R27.2 R28.2 VBAT.1 | length 3.5
  Top Side w0.3: C50.2@55.65,24.65 C50.2@55.675,24.675
  Top Side w0.6: R17.2@41.925,25.375 41.925,26.45 42.148,26.673 42.148,26.898 v1(42.225,26.975) ; C50.2@55.675,24.675 H17.1@57.4,24.675
  other v2: 29.9,17.5 30.45,19.625 30.7,23.725
VBAT_RAW: F1.2 Q1.3 R9.2 VBAT_RAW.1 | length 88.8
  Top Side w0.3: VBAT_RAW.1@37.4,15.85 VBAT_RAW.1@37.45,15.9
  Top Side w0.6: v1(28.825,71.225) 30.025,71.225 R9.2@30.15,71.1 ; Q1.3@34.3,18.075 34.875,17.5 34.875,15.85 VBAT_RAW.1@37.4,15.85 ; v1@35.225,25.975 v1(35.525,26.275)
  Top Side w1.5: 34.875,18.075 35.55,18.075 36.5,19.025 36.5,20.898 35.225,22.173 v1@35.225,25.975
  Bottom Side w1.5: v1(28.825,71.225) 29.025,71.225 31.225,73.425 43.1,73.425 46.95,69.575 46.95,55.15 48.8,53.3 48.8,41.78 43,35.98 43,29.95 39.325,26.275 v1(35.525,26.275)
VBAT_REF: C25.2 R9.1 R10.2 U1.10 VBAT_REF.1 | length 10.8
  Top Side w0.3: VBAT_REF.1@30.175,74.35 31.175,74.35 31.6,73.925 C25.2@31.6,72.4 31.6,71.15 R9.1@31.65,71.1 R10.2@31.65,69.8 31.65,69.7 31.45,69.5 31.35,69.5 30.55,68.7 30.55,67.26 31.25,66.56 U1.10@31.25,65.525
VBUS: H1.1 R1.2 S3.4 | length 52.5
  Top Side w0.6: R1.2@43.025,54.625 50.275,54.625 51.925,56.275 ; v1(53.1,55.175) 52,56.275 51.925,56.275 ; H1.1@54.2,66.45 52.2,66.45 51.925,66.175 v2(51.925,61.3) 51.925,56.275
  Top Side w1: S3.4@38.34,40.975 38.34,40.7 38.44,40.6 v1(39.875,40.6) ; v1(41.45,42.775) 41.525,42.85 47.001,42.85 47.126,42.725 47.475,42.725 48.15,42.05 v2(51.65,42.05)
  Bottom Side w1: v1(39.875,40.6) 40,40.725 40,41.325 v1(41.45,42.775) ; v2(51.65,42.05) 51.65,45.883 52.235,46.468 52.235,46.961 53.1,47.826 v1(53.1,55.175)
  other v2: 51.95,63.5 51.95,65.55
pads on no net: H1.4 H1.MH1 H1.MH2 H2.3 H2.9 H2.10 H11.5 H11.6 U1.3 U1.4 U1.6 U1.11 U1.26 U1.33 U1.40 U1.49 U1.50 U1.59 U1.63 U2.6 U3.4 U7.4 Y1.2 Y1.4

## Polygon pours and split planes (outlines as drawn)
GND on Bottom Side "Bottom Side-GND 1" (solid, pour order 46): 0.525,84.475 0.525,0.525 63.475,0.525 63.475,84.475 63.49,84.49
5V_BUCK on Bottom Side "Bottom Side-5V_BUCK" (solid, pour order 42): 6.225,28.025 25.9,28.025 29.175,31.3 29.175,37.6 34.4,42.825 37.275,42.825 37.275,29.25 27.775,19.75 6.225,19.75
GND on Bottom Side "Bottom Side-GND" (solid, pour order 20): 27.875,62.6 29.789,62.6 30.464,61.925 32.625,61.925 32.85,62.15 33,62 33,58.675 33,58.375 30.575,55.95 27.875,55.95
VBUS on Bottom Side "Bottom Side-VBUS" (solid, pour order 6): 50.775,60.15 51,60.15 52.275,58.875 52.225,58.825 52.225,46.45 50.775,45 50.775,38.6 63.061,38.6 63.061,73.513 54.755,73.513 50.775,69.331
3V3_PROG on Bottom Side "Bottom Side-3V3_PROG" (solid, pour order 4): 50.875,60.15 52.175,58.85 52.25,58.85 52.25,46.475 52.225,46.45 50.775,45 48.475,45 48.475,74.05 34.625,74.05 34.625,73.928 25.075,73.928 25.075,84.975 63.925,84.975 63.925,74.05 55.393,74.05 50.875,69.532
no net on Bottom Side "Bottom Side-No Net" (solid, pour order 2): 63.925,84.95
no net on Bottom Side "Bottom Side-No Net 1" (solid, pour order 0): 55.1,85
GND on Top Side "Top Side-GND 4" (solid, remove dead copper, pour order 44): 0.525,84.475 0.525,0.525 63.475,0.525 63.475,84.475
VBUS on Top Side "Top Side-VBUS" (solid, pour order 40): 36.975,42.45 38.975,44.45 52.625,44.45 52.825,44.25 52.725,44.15 52.725,38.75 37.5,38.75 36.975,39.275
GND on Top Side "Top Side-GND 3" (solid, pour order 38): 12.675,27.8 22.15,27.8 22.375,28.025 22.6,27.8 22.6,23.2 22.45,23.05 22.275,23.225 18.375,23.225 18.375,23.625 17.55,24.45 13.45,24.45 12.675,25.225
Net5V_BUCK_RAW_1 on Top Side "Top Side-Net5V_BUCK_RAW_1" (solid, pour order 36): 14.55,24.325 17.675,24.325 18.35,23.65 18.35,21.025 20.25,19.125 20.25,15.65 26.825,9.075 26.825,0.025 8.65,0.025 7.325,1.35 7.325,4.95 11.125,4.95 13.375,2.7 19.05,2.7 19.05,9.65 14.55,14.15
5V_BUCK on Top Side "Top Side-5V_BUCK" (solid, pour order 34): 14,14.1 18.625,9.475 18.625,3.15 13.5,3.15 11.05,5.6 11.05,19.6 5.525,19.6 5.525,25.875 8.25,25.875 10.325,27.95 17.65,27.95 17.65,26.825 17.525,26.7 12.675,26.7 12.675,24.925 13.3,24.3 14,24.3
GND on Top Side "Top Side-GND" (solid, pour order 32): 9.975,38.45 10,38.425 13,38.425 13,36.925 12.95,36.875 13.2,36.625 14.725,36.625 14.875,36.475 14.875,34.75 10.25,34.75 9.95,35.05 9.95,38.425
no net on Top Side "Top Side-No Net" (solid, pour order 30): 54.825,65.3
GND on Top Side "Top Side-GND 1" (solid, pour order 28): 52.776,74.225 63.125,74.225 63.125,61.889 52.805,61.861
GND on Top Side "Top Side-GND 2" (solid, pour order 24): 39.1,15.875 45.975,15.875 45.975,20.6 39.1,20.6
VBAT on Top Side "Top Side-VBAT" (solid, pour order 22): 28.35,25.125 28.35,38.425 32.775,38.425 32.887,38.313 32.887,25.725 34.3,25.725 34.3,20.125 32.75,18.575 25.3,18.575 25.3,25.125
M2_OUT2 on Top Side "Top Side-M2_OUT2" (solid, pour order 18): 43.4,14.65 44.025,14.65 44.2,14.825 44.2,15.85 45.875,15.85 47.975,13.75 52.2,13.75 57.1,8.85 62.325,8.85 62.325,14.9 60.775,16.45 43.4,16.45
no net on Top Side "Top Side-No Net 1" (solid, pour order 16): 44.55,15.775
no net on Top Side "Top Side-No Net 2" (solid, pour order 14): 44.25,16.15
M2_OUT1 on Top Side "Top Side-M2_OUT1" (solid, pour order 12): 44.05,16.1 45.5,16.1 45.575,16.175 48.075,13.675 52.275,13.675 57.1,8.85 62.325,8.85 62.35,8.875 62.35,1.825 53.25,1.825 53.15,1.725 53.15,6.975 50.425,9.7 48.225,9.7 44.25,13.675 44.25,16.15
M1_OUT2 on Top Side "Top Side-M1_OUT2" (solid, pour order 10): 42.3,16.15 43.275,16.15 43.275,14.65 48.225,9.7 50.425,9.7 53.15,6.975 53.15,1.725 45.4,1.725 45.35,1.775 45.35,7.025 42.3,10.075
M1_OUT1 on Top Side "Top Side-M1_OUT1" (solid, pour order 8): 41.3,16.125 41.325,16.15 42.3,16.15 42.3,10.075 45.35,7.025 45.35,1.775 38.075,1.775 38.075,11 41.3,14.225 41.3,16.25 41.325,16.25
GND on Ground Plane (split plane): 63.49,0.51 0.51,0.51 0.51,84.49 5.7,84.49 5.7,77.325 21.45,77.325 21.45,84.49 63.49,84.49
3V3 on Power Plane (split plane): 63.49,34.654 40.354,34.654 40.354,50.925 40.345,50.975 40.317,51.017 40.275,51.045 40.225,51.054 40.004,51.054 40.004,51.4 39.995,51.45 39.967,51.492 39.925,51.52 39.875,51.529 34.75,51.529 34.7,51.52 34.658,51.492 34.63,51.45 34.621,51.4 34.621,51.054 34.3,51.054 34.25,51.045 34.208,51.017 34.18,50.975 34.171,50.925 34.171,45.354 19.575,45.354 19.525,45.345 19.483,45.317 19.455,45.275 19.446,45.225 19.446,39.504 13.479,39.504 13.479,65.446 19.725,65.446 19.775,65.455 19.817,65.483 19.845,65.525 19.854,65.575 19.854,73.321 24.575,73.321 24.625,73.33 24.667,73.358 24.695,73.4 24.704,73.45 24.704,84.49 63.49,84.49
5V on Power Plane (split plane): 39.746,51.054 34.879,51.054 34.879,51.271 39.746,51.271
no net on Power Plane (split plane): 34.171,44.779 20.175,44.779 20.15,44.775 20.125,44.779 20.075,44.77 20.033,44.742 20.005,44.7 19.996,44.65 19.996,38.879 13.479,38.879 13.479,39.246 19.575,39.246 19.625,39.255 19.667,39.283 19.695,39.325 19.704,39.375 19.704,45.096 34.171,45.096
no net on Power Plane (split plane): 40.096,34.525 40.105,34.475 40.133,34.433 40.175,34.405 40.225,34.396 63.49,34.396 63.49,34.254 40.2,34.254 40.15,34.245 40.108,34.217 40.08,34.175 40.071,34.125 40.071,29.025 40.071,24.979 28.975,24.979 28.925,24.97 28.883,24.942 28.855,24.9 28.846,24.85 28.846,15.429 25.9,15.429 25.85,15.42 25.808,15.392 25.78,15.35 25.771,15.3 25.771,14.35 25.771,0.51 25.679,0.51 25.679,7.05 25.679,15.496 28.625,15.496 28.675,15.505 28.717,15.533 28.745,15.575 28.754,15.625 28.754,25.071 39.875,25.071 39.925,25.08 39.967,25.108 39.995,25.15 40.004,25.2 40.004,29.275 40.004,50.796 40.096,50.796
VBAT on Power Plane (split plane): 63.49,0.51 26.029,0.51 26.029,14.35 26.029,15.171 28.975,15.171 29.025,15.18 29.067,15.208 29.095,15.25 29.104,15.3 29.104,24.721 40.2,24.721 40.25,24.73 40.292,24.758 40.32,24.8 40.329,24.85 40.329,29.025 40.329,33.996 63.49,33.996
3V3_REG on Power Plane (split plane): 34.171,39.554 28.725,39.554 28.675,39.545 28.633,39.517 28.605,39.475 28.596,39.425 28.596,28.979 13.479,28.979 13.479,38.621 20.125,38.621 20.175,38.63 20.217,38.658 20.245,38.7 20.254,38.75 20.254,44.521 34.171,44.521
no net on Power Plane (split plane): 24.446,73.579 19.725,73.579 19.675,73.57 19.633,73.542 19.605,73.5 19.596,73.45 19.596,65.704 13.35,65.704 13.3,65.695 13.258,65.667 13.23,65.625 13.221,65.575 13.221,39.447 13.205,39.425 13.196,39.375 13.205,39.325 13.221,39.303 13.221,38.874 13.2,38.87 13.158,38.842 13.13,38.8 13.129,38.795 13.129,56.825 13.12,56.875 13.092,56.917 13.05,56.945 13,56.954 12.982,56.951 12.972,56.966 12.93,56.994 12.88,57.004 3.129,57.004 3.129,61.625 3.12,61.675 3.092,61.717 3.05,61.745 3,61.754 0.51,61.754 0.51,84.49 5.7,84.49 5.7,77.325 21.45,77.325 21.45,84.49 24.446,84.49
5V_BUCK on Power Plane (split plane): 25.521,19.679 5.729,19.679 5.729,28.346 25.521,28.346
3V3_RADIO on Power Plane (split plane): 19.296,66.079 12.875,66.079 12.825,66.07 12.783,66.042 12.755,66 12.746,65.95 12.746,65.55 12.746,57.354 3.479,57.354 3.479,62.725 3.47,62.775 3.442,62.817 3.4,62.845 3.35,62.854 2.079,62.854 2.079,74.196 19.296,74.196
5V on Power Plane (split plane): 2.871,56.875 2.88,56.825 2.908,56.783 2.95,56.755 3,56.745 12.871,56.745 12.871,28.954 5.15,28.954 5.1,28.945 5.058,28.917 5.03,28.875 5.021,28.825 5.021,19.15 5.03,19.1 5.058,19.058 5.1,19.03 5.15,19.021 25.871,19.021 25.88,18.971 25.908,18.929 25.95,18.901 26,18.891 26.05,18.901 26.092,18.929 26.12,18.971 26.129,19.021 26.129,28.346 29.075,28.346 29.125,28.355 29.167,28.383 29.195,28.425 29.204,28.475 29.204,38.971 34.75,38.971 34.8,38.98 34.842,39.008 34.87,39.05 34.879,39.1 34.879,50.796 39.746,50.796 39.746,29.275 39.746,25.329 28.625,25.329 28.575,25.32 28.533,25.292 28.505,25.25 28.496,25.2 28.496,15.754 25.55,15.754 25.5,15.745 25.458,15.717 25.43,15.675 25.421,15.625 25.421,7.05 25.421,0.51 0.51,0.51 0.51,61.496 2.871,61.496
no net on Power Plane (split plane): 34.621,39.229 29.075,39.229 29.025,39.22 28.983,39.192 28.955,39.15 28.946,39.1 28.946,28.604 26,28.604 25.95,28.595 25.908,28.567 25.88,28.525 25.871,28.475 25.871,19.279 5.279,19.279 5.279,28.696 13,28.696 13.05,28.705 13.092,28.733 13.12,28.775 13.129,28.825 13.129,38.705 13.13,38.7 13.158,38.658 13.2,38.63 13.221,38.626 13.221,28.85 13.23,28.8 13.258,28.758 13.3,28.73 13.35,28.721 28.725,28.721 28.775,28.73 28.817,28.758 28.845,28.8 28.854,28.85 28.854,39.296 34.3,39.296 34.35,39.305 34.392,39.333 34.42,39.375 34.429,39.425 34.429,50.796 34.621,50.796

## Other copper
Top Side:
  pour cut-out: 5.7,85.025 5.7,77.325 21.45,77.325 21.45,85 5.725,85
  region: 5.7,85.025
Bottom Side:
  pour cut-out: 5.7,85.025 5.7,77.325 21.45,77.325 21.45,85 5.725,85
Ground Plane (plane layer: these items are gaps in the copper):
  pour cut-out: 5.7,85.025 5.7,77.325 21.45,77.325 21.45,85 5.725,85
  lines w0.254: 0,0 0,85 64,85 64,0 0,0
Power Plane (plane layer: these items are gaps in the copper):
  pour cut-out: 5.7,85.025 5.7,77.325 21.45,77.325 21.45,85 5.725,85
  lines w0.254: -0.075,61.625 3,61.625 3,56.875 12.88,56.875 ; 0,56.825 0,-0.05 25.55,-0.05 25.55,7.05 25.55,15.625 28.625,15.625 28.625,25.2 39.875,25.2 39.875,29.275 39.875,51.4 34.75,51.4 34.75,39.1 29.075,39.1 29.075,28.475 26,28.475 26,19.021 ; 13,56.825 13,28.825 5.15,28.825 5.15,19.15 26,19.15 ; 13.25,38.75 20.125,38.75 20.125,44.65 ; 13.325,39.375 19.575,39.375 19.575,45.225 34.3,45.225 ; 20.175,44.65 34.3,44.65 ; 23.7,85 64,85 64,34.525 40.225,34.525 40.225,50.925 34.3,50.925 34.3,39.425 28.725,39.425 28.725,28.85 13.35,28.85 13.35,65.575 19.725,65.575 19.725,73.45 24.575,73.45 24.575,85 32,85 ; 25.9,0 64,0 64,34.125 40.2,34.125 40.2,29.025 40.2,24.85 28.975,24.85 28.975,15.3 25.9,15.3 25.9,14.35 25.9,-0.075 63.9,-0.075 63.9,13.75 63.9,24.85 ; 63.9,51.775 63.9,85 ; 1.95,62.725 3.35,62.725 3.35,57.225 12.875,57.225 12.875,65.55 12.875,65.95 19.425,65.95 19.425,74.325 8.375,74.325 1.95,74.325 1.95,62.725 ; 5.6,19.55 25.65,19.55 25.65,28.475 15.05,28.475 5.6,28.475 5.6,19.55

## Silkscreen, mask and mechanical layers (free items; w line width, h text height)
Top Overlay:
  text "Group 19" at 2.275,73.725 h1.4 r90
  text "DETECT" at 39.825,49.775 h0.8
Bottom Overlay:
  text "-" at 29.9,11.8 h1.52 r180
  text "-" at 34.975,11.8 h1.52 r180
  text "+" at 32.75,10.525 h1.52 r90
Board Outline:
  lines w0.254: 0,85 64,85

## Dimensions
0,86 to 64,86 on Mechanical 1
65,85 to 65,0 on Mechanical 1

## Text inside footprints (layer, text, board x,y; h text height)
H1: Mechanical 1 "PCB Edge" at 63.057,63.989 h0.25 r90
H2: Top Overlay "9" at 59.725,78.05 h1.5; Top Overlay "10" at 59.725,80.59 h1.5; Top Overlay "1" at 46.665,78.05 h1.5; Top Overlay "2" at 46.165,80.59 h1.5
H10: Top Overlay "2" at 8.363,68.765 h1.5; Top Overlay "1" at 8.863,66.225 h1.5; Top Overlay "8" at 19.543,68.745 h1.5; Top Overlay "7" at 19.543,66.245 h1.5
H11: Top Overlay "1" at 55.7,34.4 h1.52
S3: Top Overlay "ON" at 27.175,47.05 h1; Top Overlay "1" at 29.12,40.225 h0.8; Top Overlay "2" at 31.72,40.325 h0.8; Top Overlay "3" at 34.32,40.275 h0.8; Top Overlay "4" at 36.795,40.3 h0.8
U2: Mechanical 13 "*" at 20.93,24.344 h1.27 r180